# Altium PCB ZhangXue.PcbDoc
Units mil, origin at the board's own origin, x right, y up, seen from the top; angles counter-clockwise.
Board outline 3937.01 x 3937.01 mil, 2 copper layers (Top Layer, Bottom Layer); 162 components, 132 nets, 544 pads, 0 vias.
Unrouted connection lines stored in the file: 381.
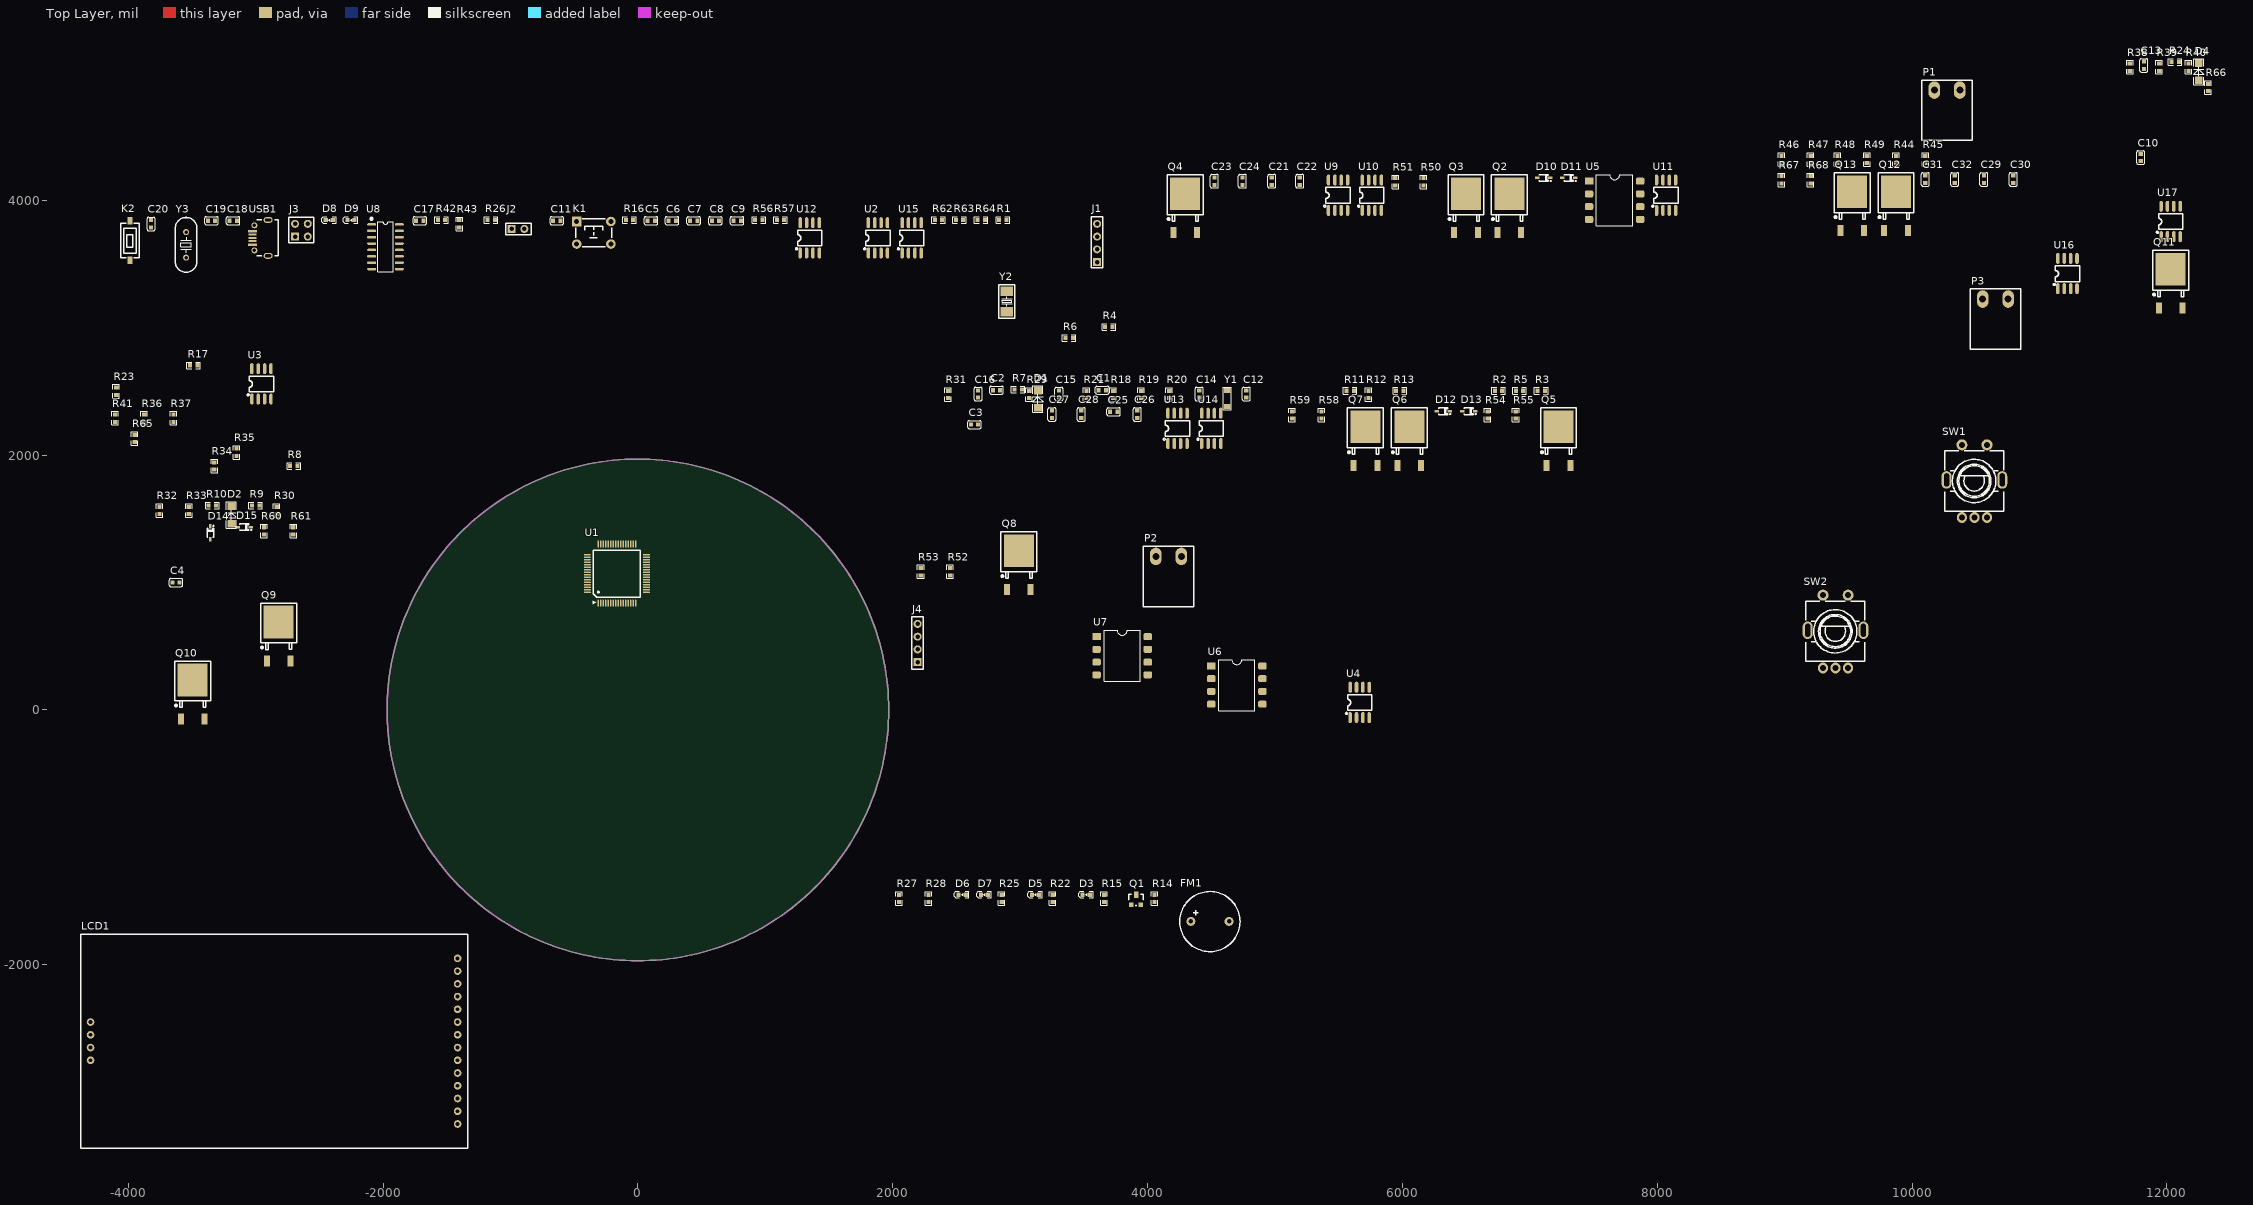
[diagram p0: Top Layer view]
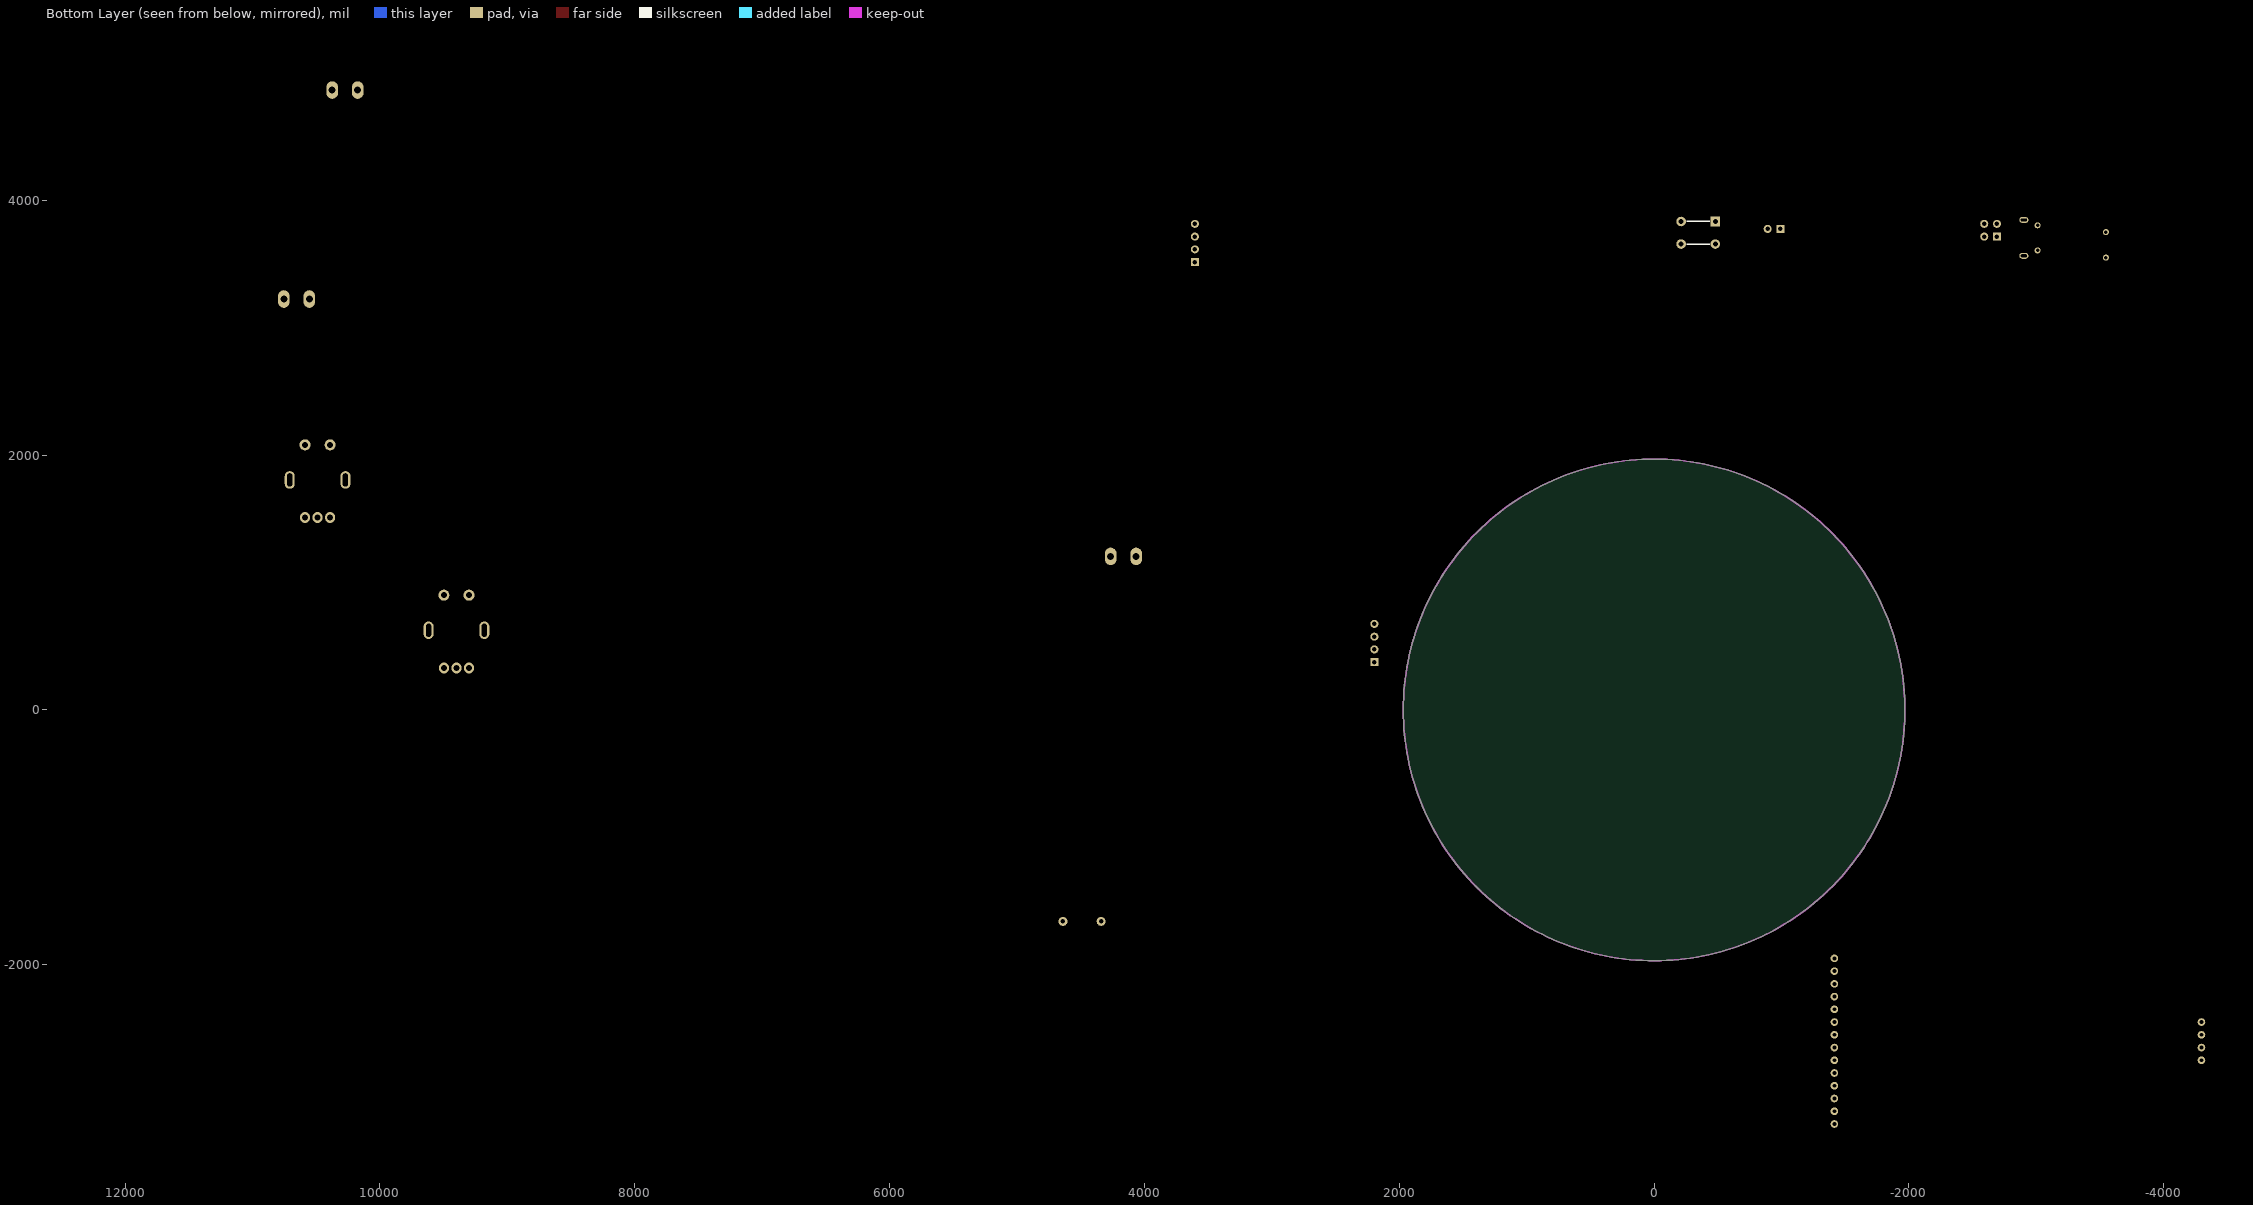
[diagram p1: Bottom Layer view, seen from below]

## Layer stack, top to bottom
Top Solder: solder mask 0.4, Solder Resist, Dk 3.5
Top Layer: signal copper 1.4
Dielectric 1: dielectric 12.6, FR-4, Dk 4.8
Bottom Layer: signal copper 1.4
Bottom Solder: solder mask 0.4, Solder Resist, Dk 3.5

## Board outline
-1968.5,0 ccw(c0,0) 0,-1968.5 ccw(c0,0) 1968.5,0 ccw(c0,0) 0,1968.5 ccw(c0,0)

## Design rules (kind name [scope] priority, off if disabled: settings)
Clearance [All] p1: gap=10
PolygonConnect [All] p1: connectstyle=Relief reliefconductorwidth=10 reliefentries=4 polygonreliefangle="90 Angle" airgapwidth=10
RoutingVias [All] p1: holewidth=28 width=50 viastyle="Through Hole" minholewidth=28 minwidth=50 maxholewidth=28 maxwidth=50
SolderMaskExpansion [All] p1: expansion=4
Width [All] p1: maxlimit=10 minlimit=10 preferedwidth=10
30 further rules are at their usual default settings.

## Components (designator, comment, footprint, x,y, rotation, side; value= is the part's Value field where it differs from the comment)
C1 "104" CAP_0603 3645,2510 r0 top
C2 "1nF" CAP_0603 2815,2510 r0 top
C3 "104" CAP_0603 2641.26,2240 r0 top
C4 "1nF" CAP_0603 -3625,1000 r0 top
C5 "104" CAP_0603 103.74,3840 r0 top
C6 "104" CAP_0603 268.74,3840 r0 top
C7 "104" CAP_0603 438.74,3840 r0 top
C8 "104" CAP_0603 608.74,3840 r0 top
C9 "104" CAP_0603 778.74,3840 r0 top
C10 "104" CAP_0603 11795,4336.26 r90 top
C11 "104" CAP_0603 -636.26,3840 r0 top
C12 "12pF" CAP_0603 4775,2480 r90 top
C13 "1nF" CAP_0603 11820,5060 r90 top
C14 "12pF" CAP_0603 4405,2480 r90 top
C15 "20pF" CAP_0603 3305,2480 r90 top
C16 "20pF" CAP_0603 2670,2480 r90 top
C17 "104" CAP_0603 -1711.26,3840 r0 top
C18 "104" CAP_0603 -3176.26,3840 r0 top
C19 "22p" CAP_0603 -3346.26,3840 r0 top
C20 "22p" CAP_0603 -3821.26,3815 r90 top
C21 "1.5uF/25V" CAP_0603 4975,4150 r90 top
C22 "1.5uF/25V" CAP_0603 5195,4150 r90 top
C23 "10uF/16V" CAP_0603 4525,4150 r90 top
C24 "10uF/16V" CAP_0603 4745,4150 r90 top
C25 "1.5uF/25V" CAP_0603 3735,2340 r0 top
C26 "1.5uF/25V" CAP_0603 3920,2320 r90 top
C27 "10uF/16V" CAP_0603 3250,2320 r90 top
C28 "10uF/16V" CAP_0603 3480,2320 r90 top
C29 "1.5uF/25V" CAP_0603 10565,4165 r90 top
C30 "1.5uF/25V" CAP_0603 10795,4165 r90 top
C31 "10uF/16V" CAP_0603 10105,4165 r90 top
C32 "10uF/16V" CAP_0603 10335,4165 r90 top
D1 "ZMM3V3" LL34 3140,2440 r90 top
D2 "ZMM3V3" LL34 -3190,1530 r90 top
D3 "LED" LED_0603_B 3520,-1450 r0 top
D4 "ZMM3V3" LL34 12250,5010 r90 top
D5 "LED" LED_0603_B 3120,-1450 r0 top
D6 "LED" LED_0603_B 2545,-1450 r0 top
D7 "LED" LED_0603_B 2720,-1450 r0 top
D8 "LED" LED_0603_B -2421.26,3845 r0 top
D9 "LED" LED_0603_B -2251.26,3845 r0 top
D10 "SS54" SOD-323 7110,4175 r0 top
D11 "SS54" SOD-323 7305,4175 r0 top
D12 "SS54" SOD-323 6320,2345 r0 top
D13 "SS54" SOD-323 6520,2345 r0 top
D14 "SS54" SOD-323 -3355,1390 r90 top
D15 "SS54" SOD-323 -3090,1435 r0 top
FM1 "BUZZER" BUZZ-12*7.5 4490,-1660 r0 top
J1 "Header" "Header 2.54X4" 3603.74,3665 r90 top
J2 "Header" "Header 2.54X2" -941.26,3775 r0 top
J3 "Header" "Header 2.54_2x2" -2641.26,3765 r0 top
J4 "Header 2.54_4" "Header F 2.54X4" 2195,525 r90 top
K1 "DIP-Button_4P" "TSW DIP-6*6*6" -346.26,3745 r0 top
K2 "TS-Button_2P" SW_SMD_6.1*3.7 -3986.26,3685 r90 top
LCD1 "Youxin_TFT_LCD-2.4" Youxin_TFT_LCD-2.4 -2855.55,-2600 r0 top
P1 "HT-2P" HT508-2P-H 10275,4865 r0 top
P2 "HT-2P" HT508-2P-H 4165,1205 r0 top
P3 "HT-2P" HT508-2P-H 10655,3225 r0 top
Q1 "S8050" SOT-23-3 3910,-1490 r0 top
Q2 "IRLR7843" TO-252-2 6840,3900 r0 top
Q3 "IRLR7843" TO-252-2 6500,3900 r0 top
Q4 "IRLR7843" TO-252-2 4295,3900 r0 top
Q5 "IRLR7843" TO-252-2 7225,2070 r0 top
Q6 "IRLR7843" TO-252-2 6055,2070 r0 top
Q7 "IRLR7843" TO-252-2 5710,2070 r0 top
Q8 "IRLR7843" TO-252-2 2990,1097.4 r0 top
Q9 "IRLR7843" TO-252-2 -2820,537.4 r0 top
Q10 "IRLR7843" TO-252-2 -3495,82.4 r0 top
Q11 "IRLR7843" TO-252-2 12030,3307.4 r0 top
Q12 "IRLR7843" TO-252-2 9875,3915 r0 top
Q13 "IRLR7843" TO-252-2 9530,3915 r0 top
R1 "1k" RES_0603 2863.74,3845 r0 top
R2 "10k" RES_0603 6755,2505 r0 top
R3 "10k" RES_0603 7090,2505 r0 top
R4 "2.7k" RES_0603 3696.26,3005 r0 top
R5 "10k" RES_0603 6920,2505 r0 top
R6 "10k" RES_0603 3385,2920 r0 top
R7 "5.1k" RES_0603 2985,2515 r0 top
R8 "2.7k" RES_0603 -2700,1915 r0 top
R9 "10k" RES_0603 -3000,1605 r0 top
R10 "5.1k" RES_0603 -3340,1605 r0 top
R11 "10k" RES_0603 5590,2505 r0 top
R12 "10k" RES_0603 5735,2475 r90 top
R13 "10k" RES_0603 5980,2505 r0 top
R14 "1k" RES_0603 4055,-1480 r90 top
R15 "10k" RES_0603 3660,-1480 r90 top
R16 "10k" RES_0603 -66.26,3845 r0 top
R17 "2.7k" RES_0603 -3486.26,2705 r0 top
R18 "10k" RES_0603 3730,2475 r90 top
R19 "10k" RES_0603 3950,2475 r90 top
R20 "10k" RES_0603 4170,2475 r90 top
R21 "10k" RES_0603 3520,2475 r90 top
R22 "240" RES_0603 3255,-1480 r90 top
R23 "10k" RES_0603 -4095,2501.26 r90 top
R24 "5.1k" RES_0603 12065,5085 r0 top
R25 "240" RES_0603 2855,-1480 r90 top
R26 "10k" RES_0603 -1151.26,3845 r0 top
R27 "240" RES_0603 2050,-1480 r90 top
R28 "240" RES_0603 2280,-1480 r90 top
R29 "1.2MΩ" RES_0603 3070,2475 r90 top
R30 "390" RES_0603 -2835,1565 r90 top
R31 "390" RES_0603 2435,2475 r90 top
R32 "390" RES_0603 -3755,1565 r90 top
R33 "390" RES_0603 -3525,1565 r90 top
R34 "390" RES_0603 -3325,1915 r90 top
R35 "390" RES_0603 -3150,2021.26 r90 top
R36 "4.7k" RES_0603 -3875,2290 r90 top
R37 "4.7k" RES_0603 -3645,2290 r90 top
R38 "4.7k" RES_0603 11710,5045 r90 top
R39 "4.7k" RES_0603 11940,5045 r90 top
R40 "4.7k" RES_0603 12170,5045 r90 top
R41 "4.7k" RES_0603 -4105,2290 r90 top
R42 "240" RES_0603 -1541.26,3845 r0 top
R43 "240" RES_0603 -1401.26,3815 r90 top
R44 "4.7k" RES_0603 9875,4320 r90 top
R45 "4.7k" RES_0603 10105,4320 r90 top
R46 "4.7k" RES_0603 8975,4320 r90 top
R47 "4.7k" RES_0603 9205,4320 r90 top
R48 "4.7k" RES_0603 9415,4320 r90 top
R49 "4.7k" RES_0603 9645,4320 r90 top
R50 "20" RES_0603 6165,4145 r90 top
R51 "20" RES_0603 5945,4145 r90 top
R52 "0Ω" RES_0603 2450,1085 r90 top
R53 "0Ω" RES_0603 2220,1085 r90 top
R54 "20" RES_0603 6670,2315 r90 top
R55 "20" RES_0603 6890,2315 r90 top
R56 "10k" RES_0603 948.74,3845 r0 top
R57 "10k" RES_0603 1118.74,3845 r0 top
R58 "20" RES_0603 5365,2315 r90 top
R59 "20" RES_0603 5135,2315 r90 top
R60 "20" RES_0603 -2935,1405 r90 top
R61 "20" RES_0603 -2705,1405 r90 top
R62 "10k" RES_0603 2358.74,3845 r0 top
R63 "10k" RES_0603 2523.74,3845 r0 top
R64 "10k" RES_0603 2693.74,3845 r0 top
R65 "20" RES_0603 -3950,2130 r90 top
R66 "20" RES_0603 12325,4885 r90 top
R67 "20" RES_0603 8975,4160 r90 top
R68 "20" RES_0603 9205,4160 r90 top
SW1 "EC11" SW_EC11 10490,1795 r0 top
SW2 "EC11" SW_EC11 9400,615 r0 top
U1 "STM32F103RCT6" LQFP_64_10X10 -165,1070 r0 top
U2 "ACS712ELCTR-20A-T" SOIC-8_150MIL 1883.74,3705 r90 top
U3 "ACS712ELCTR-20A-T" SOIC-8_150MIL -2955,2559 r90 top
U4 "ACS712ELCTR-20A-T" SOIC-8_150MIL 5665,59 r90 top
U5 "HCPL2630SD" SOP8_2_54 7465,4150 r0 top
U6 "HCPL2630SD" SOP8_2_54 4500,345 r0 top
U7 "HCPL2630SD" SOP8_2_54 3600,575 r0 top
U8 "CH340G" SOP-16 -1981.26,3635 r0 top
U9 "IR2104STRPBF" SOIC-8_150MIL 5495,4040 r90 top
U10 "IR2104STRPBF" SOIC-8_150MIL 5760,4040 r90 top
U11 "MC34063" SOIC-8_150MIL 8070,4040 r90 top
U12 "CAT24C256WI-GT3" SOIC-8_150MIL 1348.74,3705 r90 top
U13 "IR2104STRPBF" SOIC-8_150MIL 4235,2210 r90 top
U14 "IR2104STRPBF" SOIC-8_150MIL 4500,2210 r90 top
U15 "LM75AD" SOIC-8_150MIL 2148.74,3705 r90 top
U16 "IR2104STRPBF" SOIC-8_150MIL 11220,3425 r90 top
U17 "IR2104STRPBF" SOIC-8_150MIL 12030,3834 r90 top
USB1 "USB" USB_Micro_DIP41 -2916.26,3705 r0 top
Y1 "32.768kHz" X3215 4625,2380 r90 top
Y2 "8MHz" OSC-SMD_L5.0-W3.2 2895,3205.71 r90 top
Y3 "12MHz" XTAL1 -3546.26,3650 r90 top

## Footprints (in the part's own frame and the unit in brackets; to place one, negate y for a bottom-side part, rotate by r counter-clockwise, add the part's x,y. Pads: shape width x height; smd on the part's side, far side on the other; paste and mask are expansions set on the pad)
BUZZ-12*7.5 [mil] "外径12mm，脚距7.5mm"
  round 70 hole 35.4: 1(-149.6,0) 2(149.6,0)
  silkscreen extent -237,-237 236,235, body extent -243,-241 229,232, height 339
CAP_0603 [mm]
  rect 0.8x0.85 smd: 1(-0.73,0) 2(0.73,0)
  silkscreen extent -1.36,-0.8 1.34,0.8, body extent -0.8,-0.4 0.8,0.4, height 0.6
"Header 2.54_2x2" [mm]
  rect 1.6x1.6 hole 0.9: 1(-1.27,-1.27)
  round 1.6 hole 0.9: 2(1.27,-1.27) 3(1.27,1.27) 4(-1.27,1.27)
  silkscreen extent -2.5,-2.5 2.5,2.6, body extent -2.54,-2.5 2.54,2.58, height 8.6
"Header 2.54X2" [mm]
  rect 1.6x1.6 hole 0.9: 1(-1.27,0)
  round 1.6 hole 0.9: 2(1.27,0)
  silkscreen extent -2.41,-1.14 2.67,1.14, body extent -2.41,-1.23 2.67,1.27, height 8.3
"Header 2.54X4" [mm]
  rect 1.6x1.6 hole 0.9: 1(-3.81,0)
  round 1.6 hole 0.9: 2(-1.27,0) 3(1.27,0) 4(3.81,0)
  silkscreen extent -4.95,-1.14 5.19,1.14, body extent -4.95,-1.23 5.21,1.27, height 8.3
"Header F 2.54X4" [mm]
  rect 1.6x1.6 hole 0.9: 1(-3.81,0)
  round 1.6 hole 0.9: 2(-1.27,0) 3(1.27,0) 4(3.81,0)
  silkscreen extent -5.2,-1.14 5.19,1.14, body extent -5.21,-1.25 5.21,1.25, height 8.6
HT508-2P-H [mm]
  oval 2.3x3.5 hole 1.4: 1(-2.54,0) 2(2.54,0)
  silkscreen extent -5,-10 5,2, body extent -5.08,-10 5.08,2, height 8.6
LED_0603_B [mm]
  rect 0.8x0.85 smd: A(0.73,0) C(-0.73,0)
  silkscreen extent -1.55,-0.65 1.35,0.65, body extent -0.81,-0.4 0.81,0.4, height 0.6
LL34 [mil]
  rect 60x60 smd: 1(-67.5,0) 2(67.5,0)
  silkscreen extent -102,-40 102,40, body extent -66,-30 71,29, height 59
LQFP_64_10X10 [mm]
  oval 0.3x1.4 smd: 1(-3.75,-5.9) 2(-3.25,-5.9) 3(-2.75,-5.9) 4(-2.25,-5.9) 5(-1.75,-5.9) 6(-1.25,-5.9) 7(-0.75,-5.9) 8(-0.25,-5.9) 9(0.25,-5.9) 10(0.75,-5.9) 11(1.25,-5.9) 12(1.75,-5.9) 13(2.25,-5.9) 14(2.75,-5.9) 15(3.25,-5.9) 16(3.75,-5.9) 33(3.75,5.9) 34(3.25,5.9) 35(2.75,5.9) 36(2.25,5.9) 37(1.75,5.9) 38(1.25,5.9) 39(0.75,5.9) 40(0.25,5.9) 41(-0.25,5.9) 42(-0.75,5.9) 43(-1.25,5.9) 44(-1.75,5.9) 45(-2.25,5.9) 46(-2.75,5.9) 47(-3.25,5.9) 48(-3.75,5.9)
  oval 1.4x0.3 smd: 17(5.9,-3.75) 18(5.9,-3.25) 19(5.9,-2.75) 20(5.9,-2.25) 21(5.9,-1.75) 22(5.9,-1.25) 23(5.9,-0.75) 24(5.9,-0.25) 25(5.9,0.25) 26(5.9,0.75) 27(5.9,1.25) 28(5.9,1.75) 29(5.9,2.25) 30(5.9,2.75) 31(5.9,3.25) 32(5.9,3.75) 49(-5.9,3.75) 50(-5.9,3.25) 51(-5.9,2.75) 52(-5.9,2.25) 53(-5.9,1.75) 54(-5.9,1.25) 55(-5.9,0.75) 56(-5.9,0.25) 57(-5.9,-0.25) 58(-5.9,-0.75) 59(-5.9,-1.25) 60(-5.9,-1.75) 61(-5.9,-2.25) 62(-5.9,-2.75) 63(-5.9,-3.25) 64(-5.9,-3.75)
  silkscreen extent -4.85,-6.08 4.7,4.7, body extent -6.07,-6.07 6.07,6.07, height 1.62
OSC-SMD_L5.0-W3.2 [mm]
  rect 1.9x2.4 smd: 1(-2.05,0) 2(2.05,0)
  silkscreen extent -3.32,-1.6 3.33,1.6, body extent -2.5,-1.47 2.5,1.73, height 1
RES_0603 [mm]
  rect 0.8x0.85 smd: 1(-0.73,0) 2(0.73,0)
  silkscreen extent -1.35,-0.65 1.35,0.65, body extent -0.8,-0.4 0.8,0.4, height 0.38
SOD-323 [mm] "SOD-323"
  rect 0.9x0.5 smd: 1(-1.3,0) 2(1.3,0)
  silkscreen extent -0.9,-0.67 1.49,0.67, body extent -1.35,-0.62 1.35,0.63, height 1.1
SOIC-8_150MIL [mm]
  oval 2.2x0.7 smd: 1(-3.023,1.905) 2(-3.023,0.635) 3(-3.023,-0.635) 4(-3.023,-1.905) 5(3.023,-1.905) 6(3.023,-0.635) 7(3.023,0.635) 8(3.023,1.905)
  silkscreen extent -2.37,-2.41 1.55,2.83, body extent -3.03,-2.57 3.03,2.57, height 1.95
SOP8_2_54 [mm]
  rect 1.7x1.4 smd: 1(0,0)
  rrect50% 1.7x1.4 smd: 2(0,-2.54) 3(0,-5.08) 4(0,-7.62) 5(10.2,-7.62) 6(10.2,-5.08) 7(10.2,-2.54) 8(10.2,0)
  silkscreen extent 1.48,-8.89 8.72,1.27, body extent -0.06,-8.8 10.34,1.06, height 3
SOP-16 [mm] "10.3*6.2*1.8mm（长宽高）"
  oval 1.8x0.5 smd: 1(-2.75,4.445) 2(-2.75,3.175) 3(-2.75,1.905) 4(-2.75,0.635) 5(-2.75,-0.635) 6(-2.75,-1.905) 7(-2.75,-3.175) 8(-2.75,-4.445) 9(2.75,-4.445) 10(2.75,-3.175) 11(2.75,-1.905) 12(2.75,-0.635) 13(2.75,0.635) 14(2.75,1.905) 15(2.75,3.175) 16(2.75,4.445)
  silkscreen extent -2.95,-5 1.52,5.74, body extent -3,-5 3,5, height 1.9
SOT-23-3 [mil]
  rect 36x36 smd: 1(-37.5,-40) 2(37.5,-40)
  rect 36x50 smd: 3(0.5,40)
  silkscreen extent -58,-45 58,45, body extent -54,-52 60,58
SW_EC11 [mm]
  oval 2x3.5 hole 1 slot 2.6 at 90 deg: 6(5.55,0.25) 7(-5.55,0.25)
  oval 2x2.2 hole 1.2: A(-2.5,-7.25) B(2.5,-7.25) C(0,-7.25)
  round 2.2 hole 1.2: D(-2.5,7.25) E(2.5,7.25)
  silkscreen extent -5.95,-5.95 5.85,6.05, body extent -5.9,-7.42 5.81,7.53, height 24.5
SW_SMD_6.1*3.7 [mm] "SW-SMD_L6.1-W3.7-LS7.9"
  rect 1.5x1 smd: A(-3.95,0) B(3.95,0)
  silkscreen extent -3.43,-1.85 3.43,1.85, body extent -4,-1.8 4,1.9, height 2.6
TO-252-2 [mil]
  rect 47.24x86.62 smd: 1(-93,-152.6) 3(93,-152.4)
  rect 236.22x255.9 smd: 4(0,152.6)
  silkscreen extent -141,-63 141,301, body extent -129,-160 129,231, height 94
"TSW DIP-6*6*6" [mm] "6*6*6mm"
  rect 1.9x1.9 hole 1: 1(-3.4,2.25)
  round 1.9 hole 1: 2(-3.4,-2.25) 3(3.4,-2.25) 4(3.4,2.25)
  silkscreen extent -3.56,-2.79 3.56,2.79, body extent -4.23,-2.79 3.98,3.21, height 5.95
USB_Micro_DIP41 [mm]
  rect 1.8x0.5 smd: 1(-2.8,-1.35) 5(-2.8,1.35)
  rect 1.6x0.4 smd: 2(-2.75,-0.65) 3(-2.75,0) 4(-2.75,0.65)
  round 1.2 hole 0.7: H1(-2.375,-2.5) H2(-2.375,2.5)
  oval 1.8x1.2 hole 0.55 slot 1.2 at 0 deg: H3(0.35,3.575) H4(0.35,-3.575)
  silkscreen extent -1.87,-3.6 2.35,3.6, body extent -2.5,-4.1 2.93,4.1, height 2.68
X3215 [mm]
  rect 1x1.3 smd: 1(0,0) 2(3.2,0)
  silkscreen extent -0.65,-0.8 3.85,0.8, body extent 0,-0.76 3.2,0.74, height 0.81
XTAL1 [mil]
  round 47.2 hole 27.5: 1(-100,0) 2(100,0)
  silkscreen extent -215,-85 215,85, body extent -223,-90 223,93, height 138
Youxin_TFT_LCD-2.4 [mil]
  round 60 hole 30: 1(-1440.55,150) 2(-1440.55,50) 3(-1440.55,-50) 4(-1440.55,-150) 5(1440.55,650) 6(1440.55,550) 7(1440.55,450) 8(1440.55,350) 9(1440.55,250) 10(1440.55,150) 11(1440.55,50) 12(1440.55,-50) 13(1440.55,-150) 14(1440.55,-250) 15(1440.55,-350) 16(1440.55,-450) 17(1440.55,-550) 18(1440.55,-650)
  silkscreen extent -1519,-841 1519,841

## Part data
C1 C2 C3 C4 C5 C6 C7 C8 C9 C10 C11 C12 C13 C14 C15 C16 C17 C18 C19 C20 C21 C22 C23 C24 C25 C26 C27 C28 C29 C30 C31 C32: library part CAP_0603
D3 D5 D6 D7 D8 D9: library part LED_0603, "发光LED"
D10 D11 D12 D13 D14 D15: "1N5819"
FM1: "蜂鸣器"
J1: library part "Header 2.54_4"
J2: library part "Header 2.54_2"
J3: library part "Header 2.54_2X2"
K1: "按键，直插，6*6*6"
K2: "贴片按键 3*6*2.5"
P1 P2 P3: library part HT端子-2P
Q1: "三极管NPN"
Q2 Q3 Q4 Q5 Q6 Q7 Q8 Q9 Q10 Q11 Q12 Q13: library part IRLR7843TRPBF, "MOS管"
R1 R2 R3 R4 R5 R6 R7 R8 R9 R10 R11 R12 R13 R14 R15 R16 R17 R18 R19 R20 R21 R22 R23 R24 R25 R26 R27 R28 R29 R30 R31 R32 R33 R34 R35 R36 R37 R38 R39 R40 R41 R42 R43 R44 R45 R46 R47 R48 R49 R50 R51 R52 R53 R54 R55 R56 R57 R58 R59 R60 R61 R62 R63 R64 R65 R66 R67 R68: library part RES_0603
SW1 SW2: library part EC11E153440D
U9 U10 U13 U14 U16 U17: "半桥驱动"
USB1: library part MicroUSB
Y1 Y2 Y3: library part XTAL-2, "晶振"

## Nets (pads, with @x,y where several pads share a name; then routed paths per layer and width w, separated by ;. In a path a pad name is that pad's centre, name@x,y a point inside that pad or via, vN(x,y) a via of type N, cw(c..) or ccw(c..) an arc to the next point about the centre after c; other vN are vias at no path point)
ADC12_IN4: D1.2 R4.1 R7.1 U1.20
ADC12_IN5: D2.2 R8.1 R10.1 U1.21
ADC12_IN6: D4.2 R17.1 R24.1 U1.22
AGND: C1.2 C2.1 C3.2 C4.1 C10.2 C13.1 C23.1 C24.1 C27.1 C28.1 C31.1 C32.1 Q4.3 Q5.3 Q8.3 Q9.3 Q12.3 Q13.3 R6.1 R9.1 R23.1 U2.5 U3.5 U4.5 U9.4 U10.4 U13.4 U14.4 U16.4 U17.4
BOOT0: J2.1 R26.1 U1.60
BOOT1: R1.2 U1.28
BUZZ: R14.1 U1.40
COIL_1+: C21.2 C25.2 C29.2 Q3.3 Q4.4 Q7.3 Q8.4 Q11.3 Q12.4 U2.1 U2.2 U9.6 U13.6 U16.6
COIL_1-: P1.1 P2.1 P3.1 U2.3 U2.4
COIL_2+: U3.1 U3.2
COIL_2-: U3.3 U3.4
COIL_3+: U4.1 U4.2
COIL_3-: U4.3 U4.4
DRIVER1+: R36.2 U5.7 U9.2
DRIVER1-: R37.2 U5.6 U10.2
DRIVER2+: R38.2 U6.7 U13.2
DRIVER2-: R39.2 U6.6 U14.2
DRIVER3+: R40.2 U7.7 U16.2
DRIVER3-: R41.2 U7.6 U17.2
EC_KEY1: R2.2 SW1.E U1.41
EC_KEY2: R11.2 SW2.E U1.61
GND: C5.2 C6.2 C7.2 C8.2 C9.2 C11.2 C12.2 C14.2 C15.2 C16.2 C17.1 C18.1 C19.1 C20.1 D1.1 D2.1 D4.1 J1.2 J4.3 K1.1 K1.4 K2.A LCD1.16 LCD1.17 Q1.2 R1.1 R7.2 R10.2 R15.2 R24.2 R26.2 R44.2 R45.2 R46.2 R47.2 R48.2 R49.2 SW1.6 SW1.7 SW1.C SW1.D SW2.6 SW2.7 SW2.C SW2.D U1.12 U1.18 U1.31 U1.47 U1.63 U5.5 U6.5 U7.5 U8.1 U12.1 U12.2 U12.3 U12.4 U12.7 U15.4 U15.5 U15.6 U15.7 USB1.5 USB1.H1
KEY_EN_OC1: K2.B R21.2 U1.8
KEY_EN_OC2: R20.2 U1.9
KEY_EN_OC3: R19.2 U1.10
KEY_OC_SELECT: R18.2 U1.2
LCD_D/C: LCD1.14 U1.29
LCD_RST: C11.1 K1.2 K1.3 LCD1.15 R16.1 U1.7
LCD_SCK: LCD1.12 U1.34
LCD_SDI(MOSI): LCD1.13 U1.36
LCD_SDO(MISO): LCD1.10 U1.35
LED_EN_OC1: D3.C U1.62
LED_EN_OC2: D5.C U1.30
LED_EN_OC3: D6.C U1.33
LED_SYSTEM: D7.C U1.54
NetC2_2: C2.2 U2.6
NetC4_2: C4.2 U3.6
NetC12_1: C12.1 U1.3 Y1.1
NetC13_2: C13.2 U4.6
NetC14_1: C14.1 U1.4 Y1.2
NetC18_2: C18.2 U8.4
NetC19_2: C19.2 U8.7 Y3.1
NetC20_2: C20.2 U8.8 Y3.2
NetC21_1: C21.1 D10.2 U9.8
NetC22_1: C22.1 P1.2 Q2.3 Q5.4 U10.6
NetC22_2: C22.2 D11.2 U10.8
NetC25_1: C25.1 D12.2 U13.8
NetC26_1: C26.1 P2.2 Q6.3 Q9.4 U14.6
NetC26_2: C26.2 D13.2 U14.8
NetC29_1: C29.1 D14.2 U16.8
NetC30_1: C30.1 P3.2 Q10.3 Q13.4 U17.6
NetC30_2: C30.2 D15.2 U17.8
NetD3_A: D3.A R22.2
NetD5_A: D5.A R25.2
NetD6_A: D6.A R27.2
NetD7_A: D7.A R28.2
NetD8_A: D8.A R42.1
NetD8_C: D8.C J3.3 U8.3
NetD9_A: D9.A R43.1
NetD9_C: D9.C J3.4 U8.2
NetFM1_2: FM1.2 Q1.3
NetJ4_4: J4.4 R52.2 R53.2
NetQ1_1: Q1.1 R14.2 R15.1
NetQ2_1: Q2.1 R51.2
NetQ3_1: Q3.1 R50.1
NetQ4_1: Q4.1 R54.1
NetQ5_1: Q5.1 R55.2
NetQ6_1: Q6.1 R59.2
NetQ7_1: Q7.1 R58.1
NetQ8_1: Q8.1 R60.1
NetQ9_1: Q9.1 R61.2
NetQ10_1: Q10.1 R66.2
NetQ11_1: Q11.1 R65.1
NetQ12_1: Q12.1 R67.1
NetQ13_1: Q13.1 R68.2
NetR4_2: R4.2 R6.2 U2.7
NetR8_2: R8.2 R9.2 U3.7
NetR17_2: R17.2 R23.2 U4.7
NetR30_2: R30.2 U5.1
NetR31_2: R31.2 U5.4
NetR32_2: R32.2 U6.1
NetR33_2: R33.2 U6.4
NetR34_2: R34.2 U7.1
NetR35_2: R35.2 U7.4
NetR50_2: R50.2 U9.7
NetR51_1: R51.1 U10.7
NetR54_2: R54.2 U9.5
NetR55_1: R55.1 U10.5
NetR58_2: R58.2 U13.7
NetR59_1: R59.1 U14.7
NetR60_2: R60.2 U13.5
NetR61_1: R61.1 U14.5
NetR62_2: R62.2 R63.2 R64.2
NetR65_2: R65.2 U16.7
NetR66_1: R66.1 U17.7
NetR67_2: R67.2 U16.5
NetR68_1: R68.1 U17.5
NetUSB1_H2: USB1.H2 USB1.H3 USB1.H4
PA9_TX1: J3.2 U1.42
PA10_RX1: J3.1 U1.43
PA11_SCL: R57.1 U1.44 U12.6
PA12_SDA: R56.1 U1.45 U12.5
PC3: U1.11
PC4: U1.24
PC5: U1.25
PC10_OS: R64.1 U1.51 U15.3
PC11_SCL: R62.1 U1.52 U15.2
PC12_SDA: R63.1 U1.53 U15.1
PD0-OSC_IN: C15.1 R29.1 U1.5 Y2.2
PD1-OSC_OUT: C16.1 R29.2 U1.6 Y2.1
PWM1+: R44.1 U1.37 U5.2
PWM1-: R45.1 U1.23 U5.3
PWM2+: R46.1 U1.38 U6.2
PWM2-: R47.1 U1.26 U6.3
PWM3+: R48.1 U1.39 U7.2
PWM3-: R49.1 U1.27 U7.3
SWCLK: J1.4 U1.49
SWDIO: J1.3 U1.46
TIM4_CH1: R3.2 SW1.B U1.58
TIM4_CH2: R5.2 SW1.A U1.59
TIM5_CH1: R13.2 SW2.B U1.14
TIM5_CH2: R12.2 SW2.A U1.15
UD+: U8.5 USB1.3
UD-: U8.6 USB1.2
USART2_RX: J4.2 U1.17
USART2_TX: J4.1 U1.16
VBUS: C17.2 R42.2 R43.2 U8.16 USB1.1
VCC_3.3V: FM1.1 LCD1.11 LCD1.18 R2.1 R3.1 R5.1 R11.1 R12.1 R13.1 R18.1 R19.1 R20.1 R21.1 R22.1 R25.1 R27.1 R30.1 R31.1 R32.1 R33.1 R34.1 R35.1 R53.1 R56.2 R57.2 U12.8 U15.8
VCC_5V: C1.1 C3.1 C10.1 R36.1 R37.1 R38.1 R39.1 R40.1 R41.1 R52.1 U2.8 U3.8 U4.8 U5.8 U6.8 U7.8
VCC_DRIVER: C23.2 C24.2 C27.2 C28.2 C31.2 C32.2 D10.1 D11.1 D12.1 D13.1 D14.1 D15.1 U9.1 U9.3 U10.1 U10.3 U13.1 U13.3 U14.1 U14.3 U16.1 U16.3 U17.1 U17.3
VCC_MAIN_OUT: Q2.4 Q3.4 Q6.4 Q7.4 Q10.4 Q11.4
VCC_MCU: C5.1 C6.1 C7.1 C8.1 C9.1 J1.1 J2.2 R16.2 R28.1 U1.1 U1.13 U1.19 U1.32 U1.48 U1.64
pads on no net: LCD1.1 LCD1.2 LCD1.3 LCD1.4 LCD1.5 LCD1.6 LCD1.7 LCD1.8 LCD1.9 U1.50 U1.55 U1.56 U1.57 U8.9 U8.10 U8.11 U8.12 U8.13 U8.14 U8.15 U11.1 U11.2 U11.3 U11.4 U11.5 U11.6 U11.7 U11.8 USB1.4

## Keep-outs
Keep-Out Layer:
  circle w10: c0,0 r1968.5